# Altium PCB lcd_keyb.PcbDoc
Units mm, origin at the board's own origin, x right, y up, seen from the top; angles counter-clockwise.
Board outline 81.03 x 19.05 mm, 2 copper layers (Top Layer, Bottom Layer), stack 1.571 mm thick; 4 components, 17 nets, 35 pads, 0 vias.
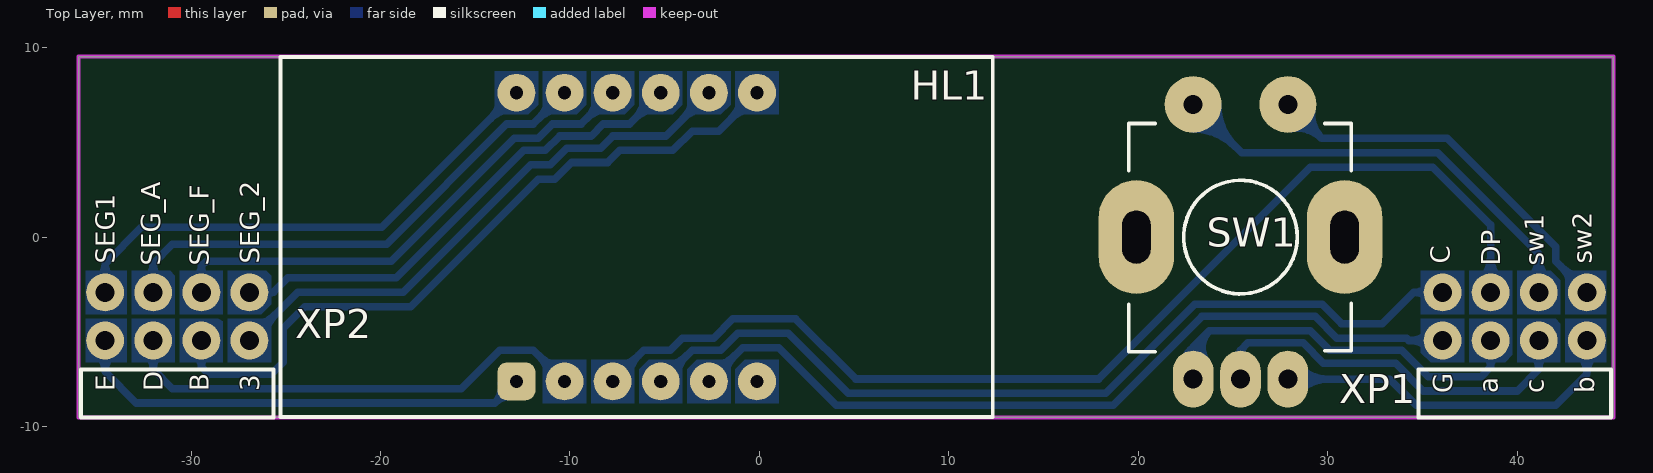
[diagram p0: Top Layer view]
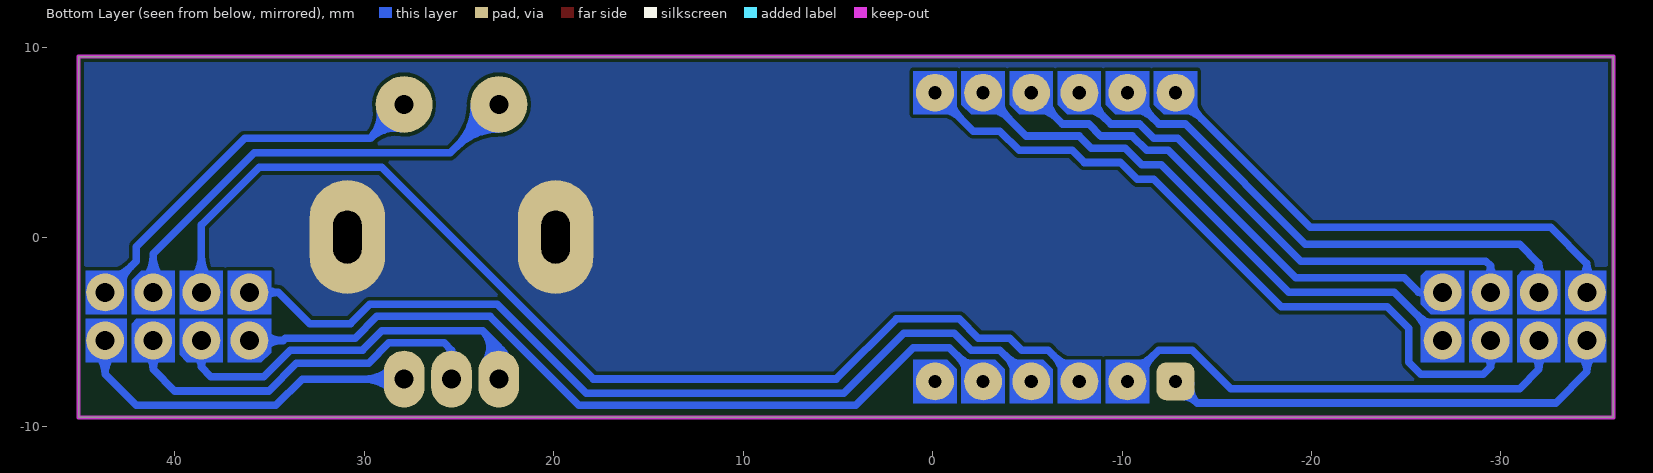
[diagram p1: Bottom Layer view, seen from below]
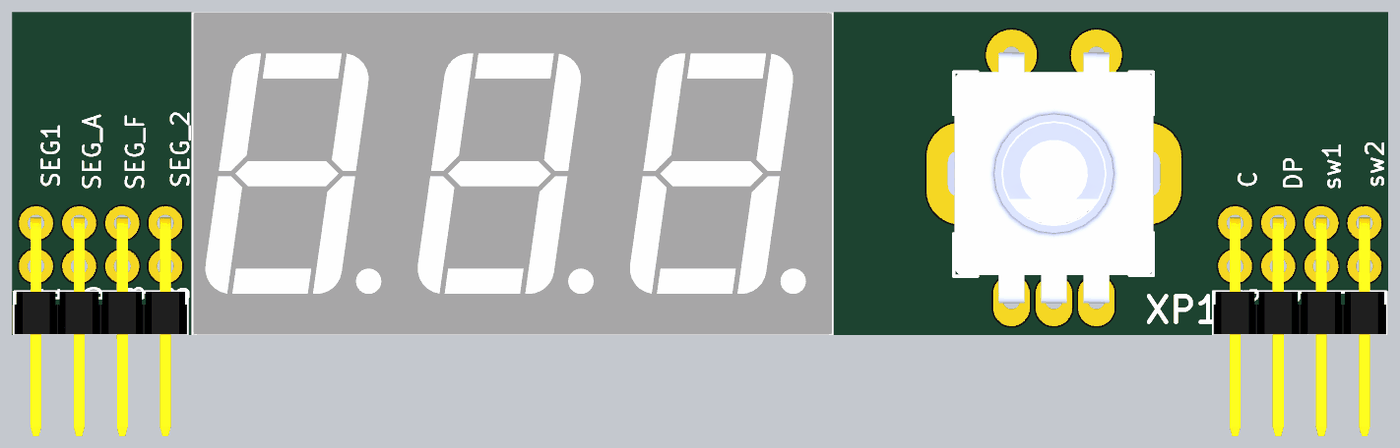
[diagram p2: 3D render of the assembled board from above, using the file's embedded part models]

## Layer stack, top to bottom
Top Solder: solder mask 0.0102, Solder Resist, Dk 3.5
Top Layer: signal copper 0.0356
Dielectric 1: dielectric 1.5, FR-4, Dk 4.8
Bottom Layer: signal copper 0.0356
Bottom Solder: solder mask 0.0102, Solder Resist, Dk 3.5

## Board outline
-35.941,-9.525 45.085,-9.525 45.085,9.525 -35.941,9.525

## Design rules (kind name [scope] priority, off if disabled: settings)
Clearance [All] p1: gap=0.2
PolygonConnect [All] p1: connectstyle=Direct reliefconductorwidth=0.254 reliefentries=4 polygonreliefangle="90 Angle" airgapwidth=0.254
RoutingVias [All] p1: holewidth=0.711 width=1.27 viastyle="Through Hole" minholewidth=0.711 minwidth=1.27 maxholewidth=0.711 maxwidth=1.27
SolderMaskExpansion [All] p1: expansion=0.102
Width [All] p1: maxlimit=5 minlimit=0.2 preferedwidth=0.254
29 further rules are at their usual default settings.

## Components (designator, comment, footprint, x,y, rotation, side; value= is the part's Value field where it differs from the comment)
HL1 "BA56-12SRWA" BX56-12 -6.477,0 r0 top
SW1 "EC11E09244AQ" EC11E09244AQ 25.4,0 r0 top
XP1 "PLD" PLD-08R 39.878,-4.191 r0 top
XP2 "PLD" PLD-08R -30.734,-4.191 r0 top

## Footprints (in the part's own frame and the unit in brackets; to place one, negate y for a bottom-side part, rotate by r counter-clockwise, add the part's x,y. Pads: shape width x height; smd on the part's side, far side on the other; paste and mask are expansions set on the pad)
BX56-12 [mm] "BA56-12SRWA Common Anode 3 Segments"
  rrect50% 2x2 hole 0.7 mask+0.1: 1(-6.35,-7.62)
  round 2 hole 0.7 mask+0.1: 2(-3.81,-7.62) 3(-1.27,-7.62) 4(1.27,-7.62) 5(3.81,-7.62) 6(6.35,-7.62) 7(6.35,7.62) 8(3.81,7.62) 9(1.27,7.62) 10(-1.27,7.62) 11(-3.81,7.62) 12(-6.35,7.62)
  silkscreen extent -18.8,-9.5 18.8,9.5, body extent -18.8,-9.5 18.8,9.5, height 8.11
EC11E09244AQ [mm]
  oval 2.15x3 hole 1: A(-2.5,-7.5) B(2.5,-7.5) C(0,-7.5)
  oval 4x6 hole 1.5 slot 2.8 at 90 deg: MH1(-5.5,0) MH2(5.5,0)
  round 3 hole 1: SW1(-2.5,7) SW2(2.5,7)
  silkscreen extent -5.9,-6.05 5.85,6, body extent -6.36,-7.65 6.37,7.15, height 24.51
PLD-08R [mm]
  round 2 hole 1 unplated: 1(-3.81,-1.27) 2(-3.81,1.27) 3(-1.27,-1.27) 4(-1.27,1.27) 5(1.27,-1.27) 6(1.27,1.27) 7(3.81,-1.27) 8(3.81,1.27)
  silkscreen extent -5.08,-5.33 5.08,-2.79, body extent -5.08,-11.29 5.08,1.6, height 5.08

## Part data
XP1 XP2: library part PLD-08R

## Nets (pads, with @x,y where several pads share a name; then routed paths per layer and width w, separated by ;. In a path a pad name is that pad's centre, name@x,y a point inside that pad or via, vN(x,y) a via of type N, cw(c..) or ccw(c..) an arc to the next point about the centre after c; other vN are vias at no path point)
ENC_A: SW1.A XP1.3 | length 29.6
  Bottom Layer w0.4: SW1.A@22.587,-6.258 ccw(c22.412,-5.802) 22.9,-5.802 ; SW1.A@22.635,-7.263 cw(c23.463,-6.675) 22.745,-5.957 ; SW1.A 22.9,-5.802 ; SW1.A@22.961,-7.032 cw(c23.854,-6.397) 23.08,-5.622 ; SW1.A@23.213,-6.258 cw(c23.388,-5.802) 22.9,-5.802 ; SW1.A@23.287,-6.8 cw(c24.245,-6.119) 23.414,-5.288 ; SW1.A@23.613,-6.568 cw(c24.637,-5.841) 23.749,-4.953 ; XP1.3@38.203,-6.151 cw(c37.788,-6.858) 38.608,-6.858 ; XP1.3 38.608,-6.858 ; XP1.3@39.013,-6.151 ccw(c39.428,-6.858) 38.608,-6.858 ; 22.9,-5.802 23.749,-4.953 ; 23.749,-4.953 29.083,-4.953 30.099,-5.969 33.909,-5.969 35.306,-7.366 38.1,-7.366 38.608,-6.858
ENC_B: SW1.B XP1.7 | length 26.6
  Bottom Layer w0.4: SW1.B 33.281,-7.5 34.671,-8.89 42.037,-8.89 43.688,-7.239 ; SW1.B@28.236,-7.836 cw(c29.047,-8.647) 29.047,-7.5 cw(c29.047,-6.353) SW1.B@28.236,-7.164 ; SW1.B@28.519,-8.119 cw(c30.012,-9.612) 30.012,-7.5 cw(c30.012,-5.388) SW1.B@28.519,-6.881 ; XP1.7@43.157,-6.06 cw(c42.112,-7.239) 43.688,-7.239 ; XP1.7 43.688,-7.239 ; XP1.7@44.219,-6.06 ccw(c45.264,-7.239) 43.688,-7.239
ENC_C: SW1.C XP1.5 | length 23.2
  Bottom Layer w0.4: SW1.C@25.199,-6.223 ccw(c25.139,-5.969) 25.4,-5.969 ; SW1.C 25.4,-5.969 ; SW1.C@25.601,-6.223 cw(c25.661,-5.969) 25.4,-5.969 ; XP1.5@40.694,-6.119 cw(c40.097,-6.985) 41.148,-6.985 ; XP1.5 41.148,-6.985 ; XP1.5@41.602,-6.119 ccw(c42.199,-6.985) 41.148,-6.985 ; 25.4,-5.969 25.781,-5.588 28.702,-5.588 29.781,-6.667 33.591,-6.667 35.052,-8.128 40.005,-8.128 41.148,-6.985
ENC_SW1: SW1.SW1 XP1.6 | length 34.9
  Bottom Layer w0.4: SW1.SW1@22.9,5.7 cw(c22.9,2.562) 25.119,4.781 cw(c27.338,7) SW1.SW1@24.2,7 ; SW1.SW1@22.9,6.1 cw(c22.9,3.927) 24.436,5.464 cw(c25.973,7) SW1.SW1@23.8,7 ; SW1.SW1 25.455,4.445 35.814,4.445 41.148,-0.889 XP1.6 ; XP1.6@40.582,-2.355 ccw(c39.217,-0.99) 41.148,-0.99 ccw(c43.079,-0.99) XP1.6@41.714,-2.355
ENC_SW2: SW1.SW2 XP1.8 | length 29.2
  Bottom Layer w0.4: SW1.SW2 29.693,5.207 ; SW1.SW2@28.045,6.112 cw(c28.249,4.866) 29.141,5.759 cw(c30.034,6.651) SW1.SW2@28.788,6.855 ; SW1.SW2@28.11,5.717 cw(c28.404,3.918) 29.693,5.207 ; SW1.SW2@29.183,6.79 ccw(c30.982,6.496) 29.693,5.207 ; XP1.8@42.888,-2.921 ccw(c40.957,-2.921) 42.322,-1.555 ccw(c43.688,-0.19) XP1.8@43.688,-2.121 ; XP1.8 42.037,-1.27 42.037,-0.508 36.322,5.207 29.693,5.207
GND: SW1.MH1 SW1.MH2
SEG_1: HL1.12 XP2.2 | length 32
  Bottom Layer w0.4: XP2.2@-34.998,-2.263 ccw(c-35.595,-1.397) -34.544,-1.397 ; XP2.2 -34.544,-1.397 ; XP2.2@-34.09,-2.263 cw(c-33.493,-1.397) -34.544,-1.397 ; HL1.12@-13.627,7.62 cw(c-15.558,7.62) -14.193,6.254 cw(c-12.827,4.889) HL1.12@-12.827,6.82 ; HL1.12 -19.939,0.508 -32.639,0.508 -34.544,-1.397
SEG_2: HL1.9 XP2.8 | length 30.5
  Bottom Layer w0.4: XP2.8 -25.654,-2.921 ; XP2.8@-26.202,-3.266 cw(c-25.654,-3.529) -25.654,-2.921 ; XP2.8@-26.202,-2.576 ccw(c-25.654,-2.313) -25.654,-2.921 ; HL1.9@-6.007,7.62 cw(c-7.938,7.62) -6.573,6.254 cw(c-5.207,4.889) HL1.9@-5.207,6.82 ; HL1.9 -6.858,5.969 -8.255,5.969 -8.89,5.334 -10.541,5.334 -11.303,4.572 -12.446,4.572 -19.177,-2.159 -24.892,-2.159 -25.654,-2.921
SEG_3: HL1.8 XP2.7 | length 35.7
  Bottom Layer w0.4: XP2.7 -24.384,-2.921 -18.796,-2.921 -12.065,3.81 -11.049,3.81 -10.16,4.699 -8.382,4.699 -7.747,5.334 -4.953,5.334 HL1.8 ; XP2.7@-26.924,-4.661 ccw(c-26.924,-2.73) -25.558,-4.095 ccw(c-24.193,-5.461) XP2.7@-26.124,-5.461 ; HL1.8@-3.467,7.62 cw(c-5.398,7.62) -4.033,6.254 cw(c-2.667,4.889) HL1.8@-2.667,6.82
SEG_A: HL1.11 XP2.4 | length 32
  Bottom Layer w0.4: XP2.4@-32.458,-2.263 ccw(c-33.055,-1.397) -32.004,-1.397 ; XP2.4 -32.004,-1.397 ; XP2.4@-31.55,-2.263 cw(c-30.953,-1.397) -32.004,-1.397 ; HL1.11@-11.087,7.62 cw(c-13.018,7.62) -11.653,6.254 cw(c-10.287,4.889) HL1.11@-10.287,6.82 ; HL1.11 -11.938,5.969 -13.335,5.969 -19.685,-0.381 -30.988,-0.381 -32.004,-1.397
SEG_B: HL1.7 XP2.5 | length 42.8
  Bottom Layer w0.4: XP2.5@-29.869,-6.151 cw(c-30.284,-6.858) -29.464,-6.858 ; XP2.5 -29.464,-6.858 ; XP2.5@-29.059,-6.151 ccw(c-28.644,-6.858) -29.464,-6.858 ; HL1.7@-0.927,7.62 cw(c-2.858,7.62) -1.493,6.254 cw(c-0.127,4.889) HL1.7@-0.127,6.82 ; HL1.7 -2.159,5.588 -3.556,5.588 -4.572,4.572 -7.366,4.572 -8.001,3.937 -9.906,3.937 -10.795,3.048 -11.684,3.048 -18.415,-3.683 -24.003,-3.683 -25.146,-4.826 -25.146,-6.604 -25.781,-7.239 -29.083,-7.239 -29.464,-6.858
SEG_C: HL1.4 XP1.2 | length 51.8
  Bottom Layer w0.4: HL1.4 -3.556,-5.969 -2.032,-5.969 -1.143,-5.08 1.524,-5.08 4.699,-8.255 18.288,-8.255 22.987,-3.556 29.718,-3.556 30.734,-4.572 32.893,-4.572 34.544,-2.921 ; HL1.4@-5.207,-6.82 ccw(c-5.207,-4.889) -3.841,-6.254 ccw(c-2.476,-7.62) HL1.4@-4.407,-7.62 ; XP1.2@35.41,-3.375 ccw(c34.544,-3.972) 34.544,-2.921 ; XP1.2@35.41,-2.467 cw(c34.544,-1.87) 34.544,-2.921 ; XP1.2 34.544,-2.921
SEG_D: HL1.2 XP2.3 | length 30.3
  Bottom Layer w0.4: XP2.3@-32.458,-6.119 cw(c-33.055,-6.985) -32.004,-6.985 ; XP2.3 -32.004,-6.985 ; XP2.3@-31.55,-6.119 ccw(c-30.953,-6.985) -32.004,-6.985 ; HL1.2@-11.087,-7.62 ccw(c-13.018,-7.62) -11.653,-6.254 ccw(c-10.287,-4.889) HL1.2@-10.287,-6.82 ; HL1.2 -11.938,-5.969 -13.716,-5.969 -15.748,-8.001 -30.988,-8.001 -32.004,-6.985
SEG_DP: HL1.3 XP1.4 | length 64.6
  Bottom Layer w0.4: HL1.3 -6.096,-5.969 -4.699,-5.969 -4.064,-5.334 -2.413,-5.334 -1.397,-4.318 1.905,-4.318 5.08,-7.493 17.907,-7.493 29.083,3.683 35.56,3.683 38.608,0.635 XP1.4 ; HL1.3@-7.747,-6.82 ccw(c-7.747,-4.889) -6.381,-6.254 ccw(c-5.016,-7.62) HL1.3@-6.947,-7.62 ; XP1.4@38.042,-2.355 ccw(c36.677,-0.99) 38.608,-0.99 ccw(c40.539,-0.99) XP1.4@39.174,-2.355
SEG_E: HL1.1 XP2.1 | length 29.1
  Bottom Layer w0.4: XP2.1@-35.04,-6.089 cw(c-35.847,-7.112) -34.544,-7.112 ; XP2.1 -34.544,-7.112 ; XP2.1@-34.048,-6.089 ccw(c-33.241,-7.112) -34.544,-7.112 ; HL1.1@-13.62,-7.727 cw(c-14.842,-7.891) -13.97,-8.763 ; HL1.1@-12.934,-8.413 ccw(c-13.098,-9.635) -13.97,-8.763 ; HL1.1 -13.97,-8.763 ; -34.544,-7.112 -32.893,-8.763 -13.97,-8.763
SEG_F: HL1.10 XP2.6 | length 31.6
  Bottom Layer w0.4: XP2.6@-29.869,-2.231 ccw(c-30.284,-1.524) -29.464,-1.524 ; XP2.6 -29.464,-1.524 ; XP2.6@-29.059,-2.231 cw(c-28.644,-1.524) -29.464,-1.524 ; HL1.10@-8.547,7.62 cw(c-10.478,7.62) -9.113,6.254 cw(c-7.747,4.889) HL1.10@-7.747,6.82 ; HL1.10 -9.398,5.969 -10.922,5.969 -11.684,5.207 -12.954,5.207 -19.431,-1.27 -29.21,-1.27 -29.464,-1.524
SEG_G: HL1.5 XP1.1 | length 48.9
  Bottom Layer w0.4: HL1.5 -0.889,-5.842 1.016,-5.842 4.064,-8.89 18.669,-8.89 23.368,-4.191 29.337,-4.191 30.48,-5.334 34.163,-5.334 34.29,-5.461 ; HL1.5@-2.667,-6.82 ccw(c-2.667,-4.889) -1.301,-6.254 ccw(c0.064,-7.62) HL1.5@-1.867,-7.62 ; XP1.1@35.469,-5.992 ccw(c34.29,-7.037) 34.29,-5.461 ; XP1.1@35.469,-4.93 cw(c34.29,-3.885) 34.29,-5.461 ; XP1.1 34.29,-5.461
pads on no net: HL1.6

## Polygon pours and split planes (outlines as drawn)
GND on Bottom Layer "Top Layer-No Net" (solid, remove dead copper, pour order 2): -36.068,9.525 -35.941,9.398 -35.941,-9.525 45.085,-9.525 45.085,9.525

## Keep-outs
Keep-Out Layer:
  the board outline again, w0.2

## Other copper
Bottom Layer:
  region net SEG_1: -13.97,8.763 -11.684,8.763 -11.684,6.985 -12.192,6.477 -13.97,6.477
  region net SEG_A: -11.43,8.763 -9.144,8.763 -9.144,6.985 -9.652,6.477 -11.43,6.477
  region net SEG_F: -8.89,8.763 -6.604,8.763 -6.604,6.985 -7.112,6.477 -8.89,6.477
  region net SEG_2: -6.35,8.763 -4.064,8.763 -4.064,6.985 -4.572,6.477 -6.35,6.477
  region net SEG_3: -3.81,8.763 -1.524,8.763 -1.524,6.985 -2.032,6.477 -3.81,6.477
  region net SEG_B: -1.27,8.763 1.016,8.763 1.016,6.477 -1.27,6.477
  region: -0.762,-6.477 1.016,-6.477 1.016,-8.763 -1.27,-8.763 -1.27,-6.985
  region net SEG_G: -3.302,-6.477 -1.524,-6.477 -1.524,-8.763 -3.81,-8.763 -3.81,-6.985
  region net SEG_C: -5.842,-6.477 -4.064,-6.477 -4.064,-8.763 -6.35,-8.763 -6.35,-6.985
  region net SEG_DP: -8.89,-6.477 -6.858,-6.477 -6.604,-6.731 -6.604,-8.763 -8.89,-8.763
  region net SEG_D: -11.43,-6.477 -9.144,-6.477 -9.144,-8.763 -11.43,-8.763
  region net ENC_B: 42.545,-4.318 44.704,-4.318 44.704,-6.604 42.545,-6.604
  region net SEG_G: 34.925,-4.318 37.211,-4.318 37.211,-6.604 35.433,-6.604 34.925,-6.096
  region net ENC_A: 37.465,-4.318 39.751,-4.318 39.751,-6.223 39.37,-6.604 37.465,-6.604
  region net ENC_C: 40.005,-4.318 42.037,-4.318 42.291,-4.572 42.291,-6.604 40.005,-6.604
  region net ENC_SW2: 42.545,-1.778 44.704,-1.778 44.704,-4.064 42.545,-4.064
  region net ENC_SW1: 40.005,-1.778 41.783,-1.778 42.291,-2.286 42.291,-4.064 40.005,-4.064
  region net SEG_DP: 37.465,-1.778 39.751,-1.778 39.751,-4.064 37.465,-4.064
  region net SEG_C: 34.925,-1.778 37.211,-1.778 37.211,-4.064 34.925,-4.064
  region net SEG_3: -28.067,-4.318 -26.035,-4.318 -25.781,-4.572 -25.781,-6.604 -28.067,-6.604
  region net SEG_B: -30.607,-4.318 -28.575,-4.318 -28.321,-4.445 -28.321,-6.604 -30.607,-6.604
  region net SEG_D: -33.147,-4.318 -30.861,-4.318 -30.861,-6.604 -33.147,-6.604
  region net SEG_2: -28.067,-1.778 -26.035,-1.778 -25.781,-2.032 -25.781,-3.556 -26.289,-4.064 -28.067,-4.064
  region net SEG_F: -30.607,-1.778 -28.321,-1.778 -28.321,-4.064 -30.607,-4.064
  region net SEG_A: -33.147,-1.778 -31.115,-1.778 -30.861,-2.032 -30.861,-4.064 -33.147,-4.064
  region net SEG_E: -35.56,-4.318 -33.401,-4.318 -33.401,-6.604 -35.56,-6.604
  region net SEG_1: -35.56,-1.778 -33.401,-1.778 -33.401,-4.064 -35.56,-4.064

## Silkscreen, mask and mechanical layers (free items; w line width, h text height)
Top Overlay:
  text "SEG1" at -34.036,-1.397 h1 r90
  text "SEG_2" at -26.416,-1.397 h1 r90
  text "C" at 36.449,-1.397 h1 r90
  text "sw2" at 43.942,-1.397 h1 r90
  text "SEG_A" at -31.623,-1.524 h1 r90
  text "SEG_F" at -29.083,-1.524 h1 r90
  text "DP" at 39.116,-1.524 h1 r90
  text "sw1" at 41.402,-1.524 h1 r90
  text "E" at -34.036,-8.128 h1 r90
  text "D" at -31.496,-8.128 h1 r90
  text "B" at -29.083,-8.128 h1 r90
  text "3" at -26.416,-8.128 h1 r90
  text "G" at 36.576,-8.255 h1 r90
  text "a" at 38.989,-8.255 h1 r90
  text "c" at 41.402,-8.255 h1 r90
  text "b" at 44.069,-8.255 h1 r90